# Altium PCB Pocket_Organ_V17_2021-03-17.pcbdoc (part 1 of 2)
Units mil, origin at the board's own origin, x right, y up, seen from the top; angles counter-clockwise.
Board outline 7067.95 x 4900.94 mil, 2 copper layers (Top Layer, Bottom Layer); 193 components, 249 nets, 797 pads, 188 vias.
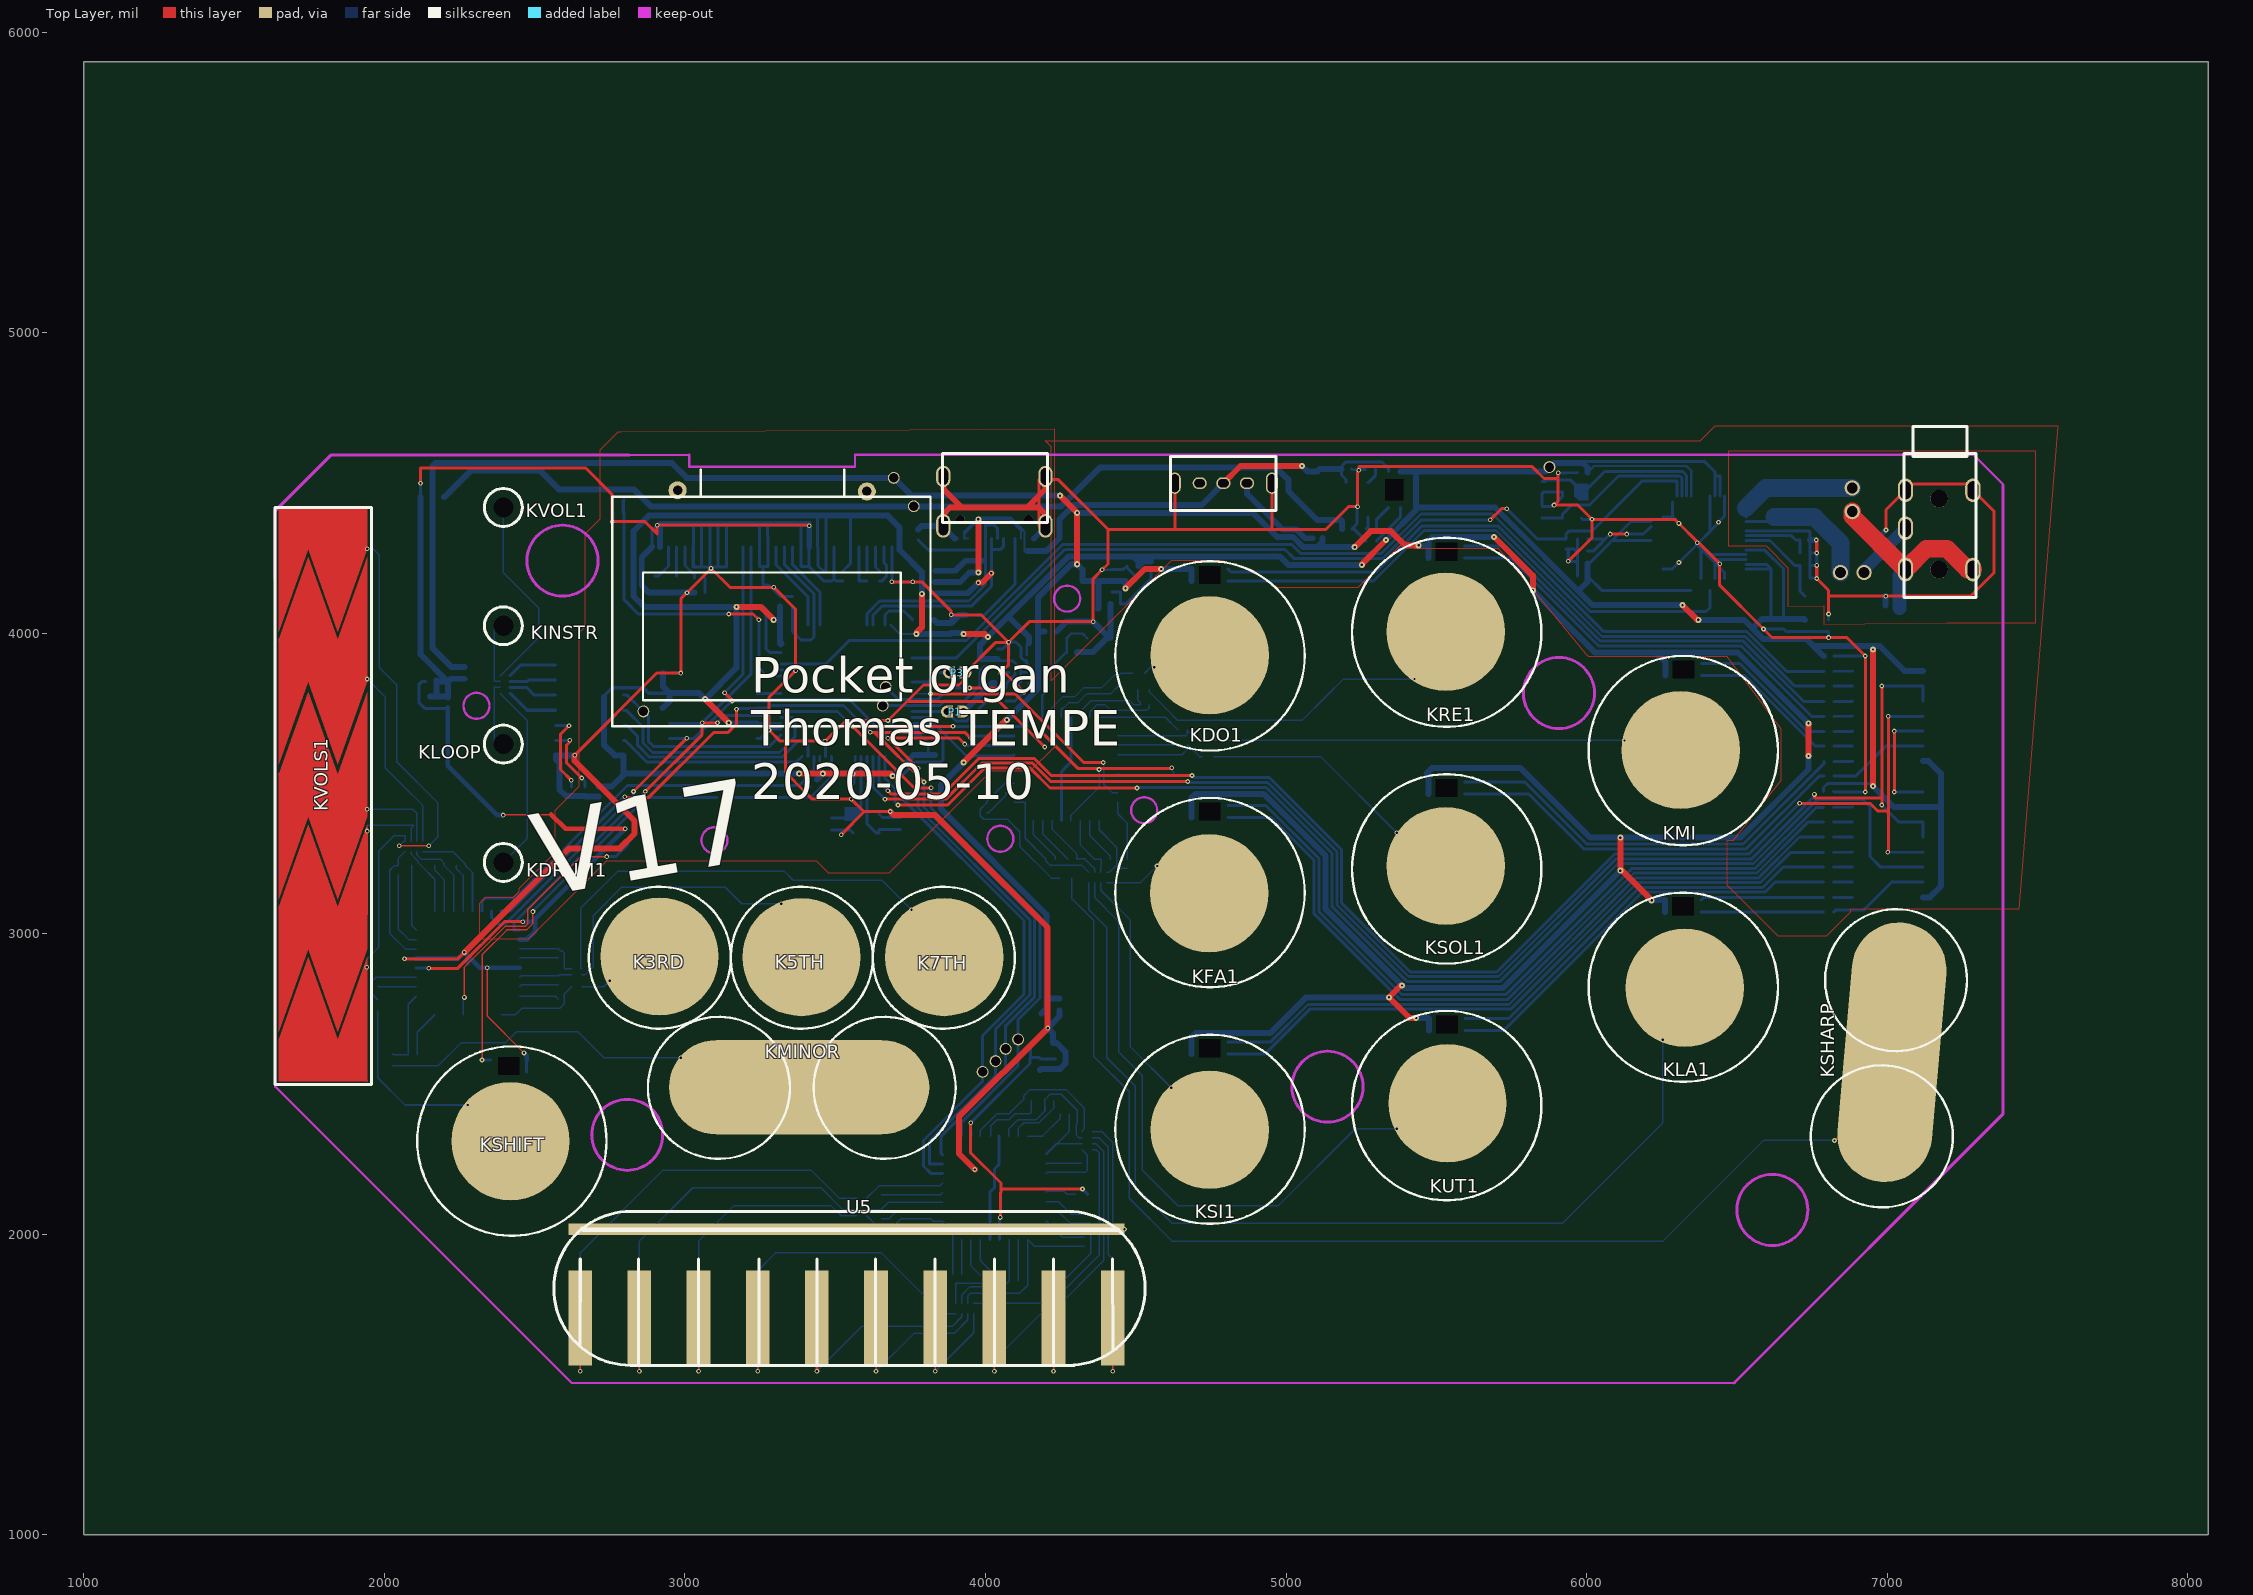
[diagram p0: Top Layer view]
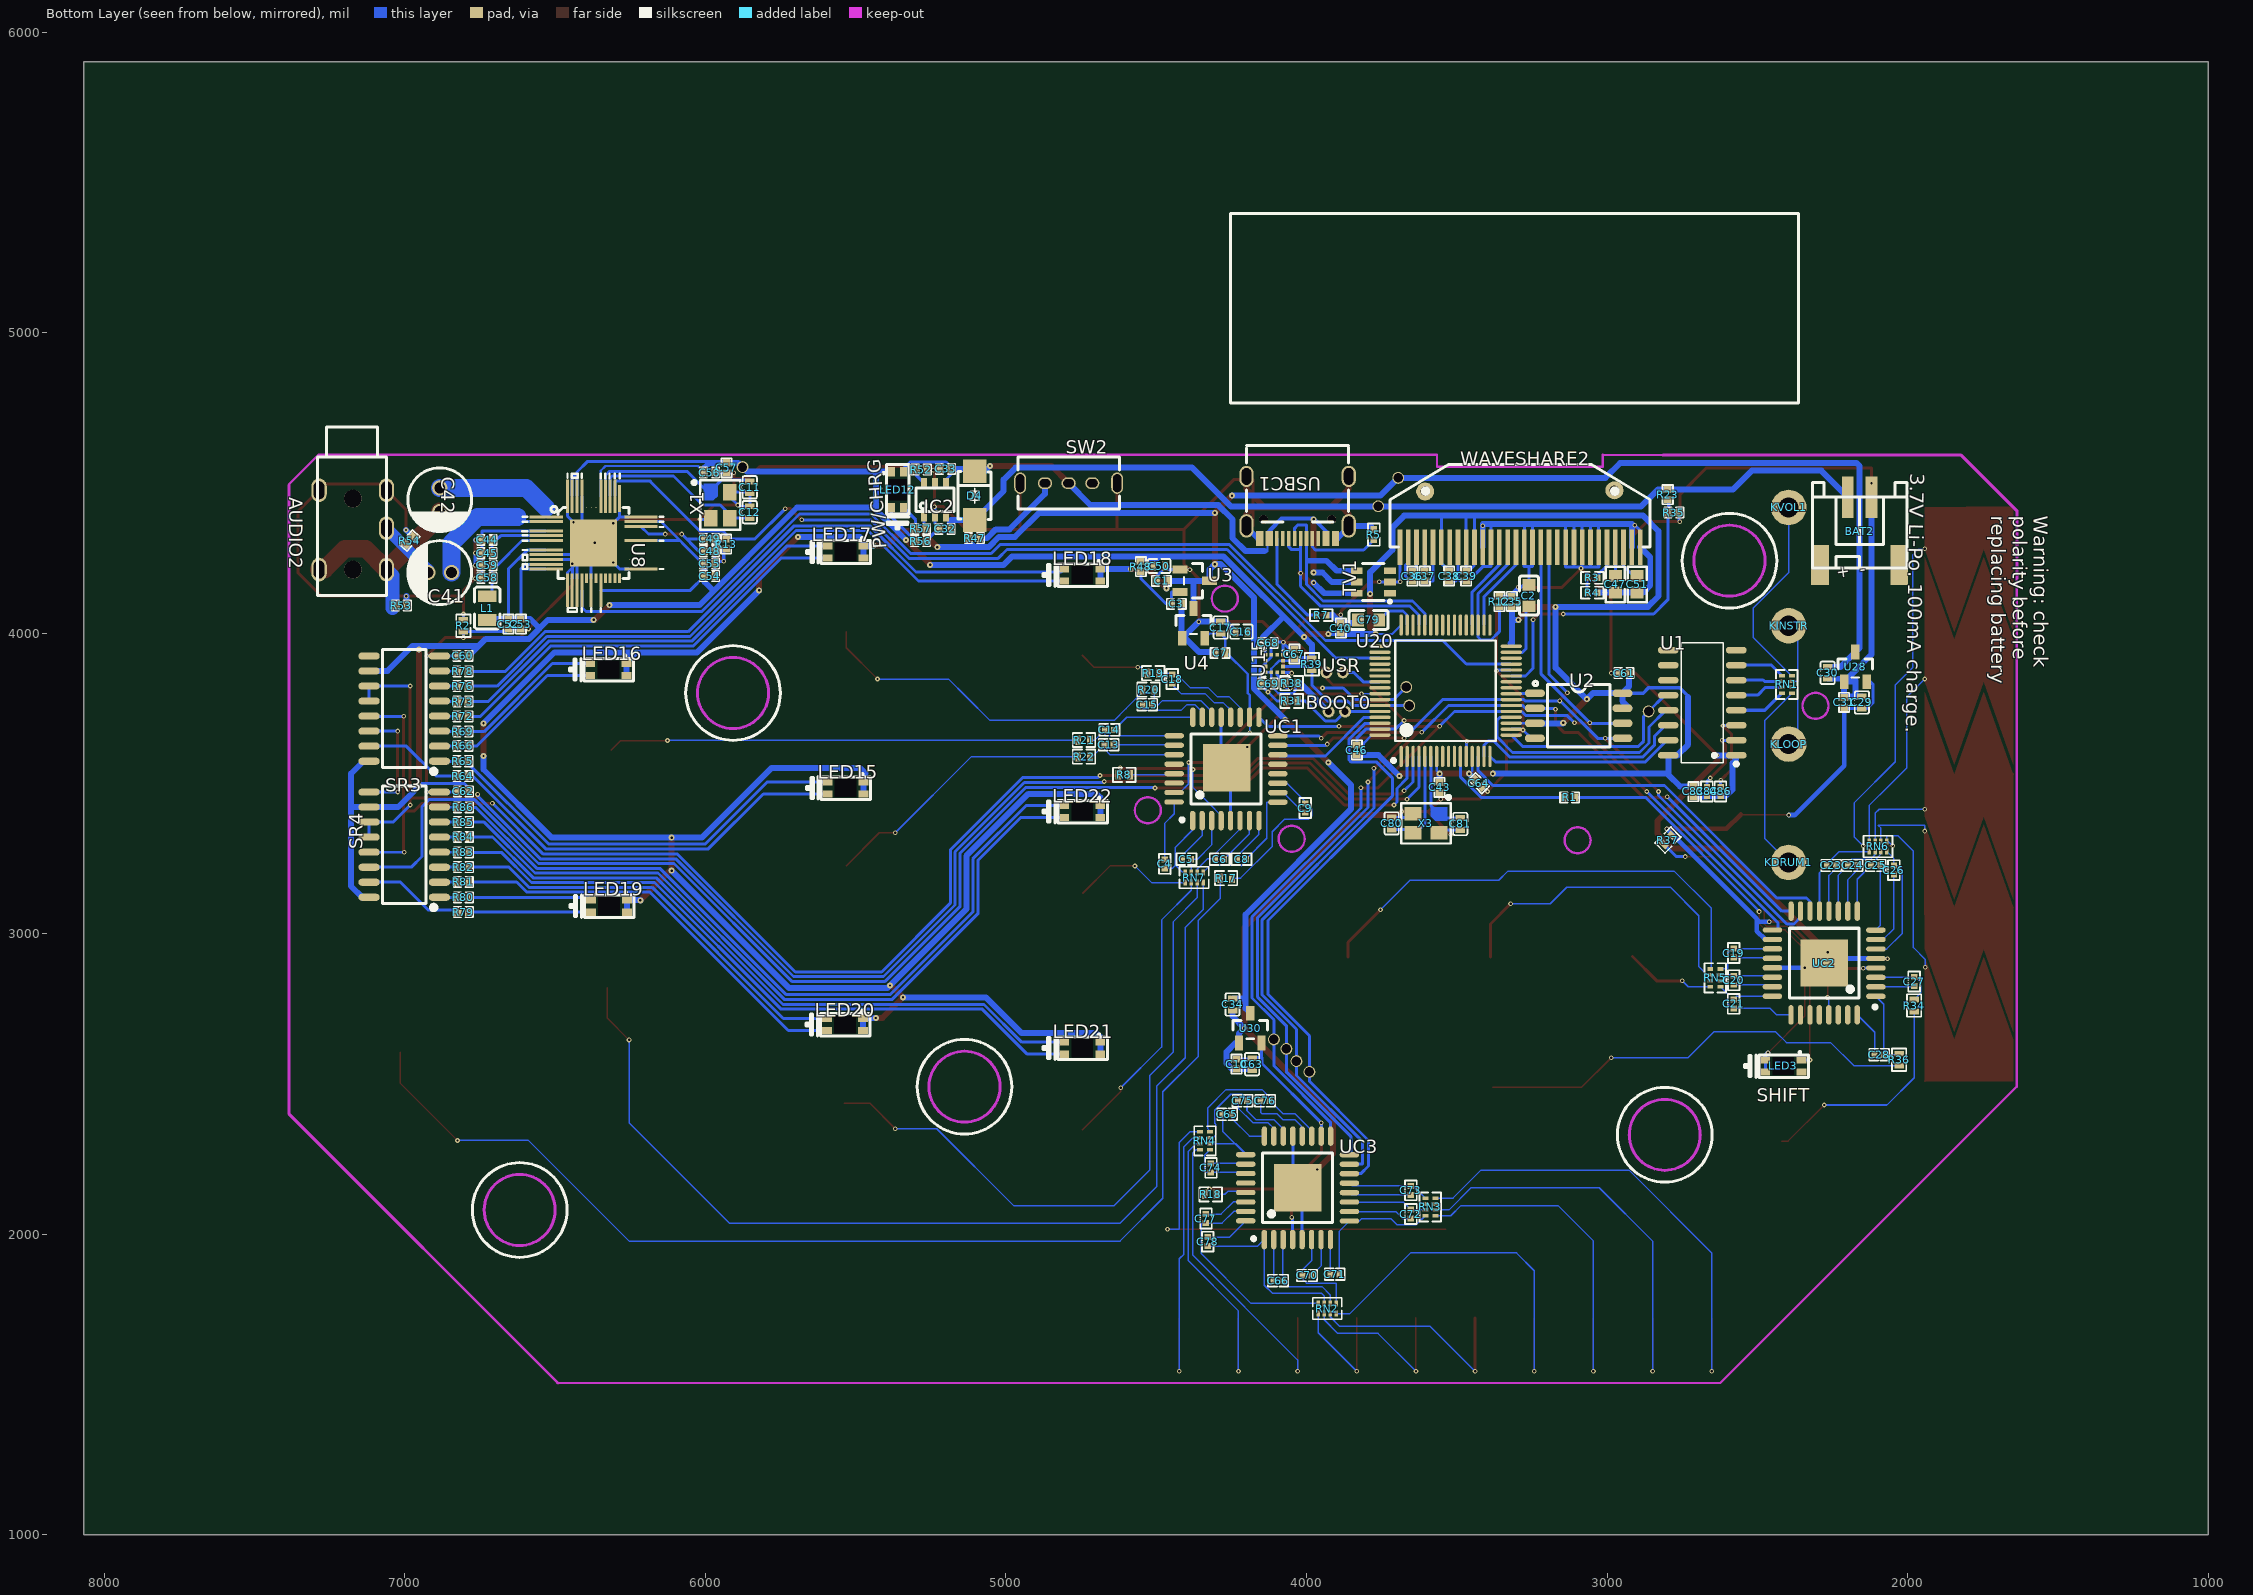
[diagram p1: Bottom Layer view, seen from below]

## Layer stack, top to bottom
Top Layer: signal copper (thickness not stored)
Dielectric: dielectric 12.6, FR-4, Dk 4.8
Bottom Layer: signal copper (thickness not stored)

## Board outline
8067.95,1000 1000,1000 1000,5900.94 8067.95,5900.94

## Components (designator, comment, footprint, x,y, rotation, side; value= is the part's Value field where it differs from the comment)
AUDIO2 "PJ-313D_C319112" PHONE-JACK-5P-6.0X12.5-H5.0 7173.22,4343.58 r90 bottom
BAT2 "A2001WR-S-2P" A2001WR-S-2P 2159.44,4339.65 r180 bottom
C1 "1u" 0402 4482.28,4174.29 r0 bottom
C2 "2.2uF" C0603 3259.84,4125.08 r270 bottom
C3 "1u" 0402 4433.07,4097.52 r180 bottom
C4 "4.7nF" C0402#1 4472.12,3232.35 r90 bottom
C5 "4.7nF" C0402#1 4399.29,3248.1 r0 bottom
C6 "4.7nF" C0402#1 4289.05,3248.1 r180 bottom
C7 "100n" 0402 4287.4,3934.13 r180 bottom
C8 "4.7nF" C0402#1 4216.22,3248.1 r0 bottom
C9 "4.7nF" C0402#1 4003.93,3418.18 r270 bottom
C10 "100n" 0402 4232.28,2566.03 r90 bottom
C11 "20pF" C0402#2 5852.36,4485.32 r270 bottom
C12 "20pF" C0402#2 5852.36,4402.64 r90 bottom
C13 "4.7nF" C0402#1 4657.47,3628.81 r0 bottom
C14 "4.7nF" C0402#1 4655.5,3678.02 r0 bottom
C15 "4.7nF" C0402#1 4529.52,3762.66 r180 bottom
C16 "1uF" C0402#2 4216.53,4005 r0 bottom
C17 "1uF" C0402#2 4285.43,4018.78 r90 bottom
C18 "4.7nF" C0402#1 4446.84,3847.31 r90 bottom
C19 "4.7nF" C0402#1 2578.74,2935.89 r90 bottom
C20 "4.7nF" C0402#1 2578.74,2845.33 r90 bottom
C21 "4.7nF" C0402#1 2578.74,2766.59 r270 bottom
C23 "4.7nF" C0402#1 2253.93,3227.46 r180 bottom
C24 "4.7nF" C0402#1 2183.07,3227.44 r180 bottom
C25 "4.7nF" C0402#1 2106.29,3227.46 r180 bottom
C26 "4.7nF" C0402#1 2045.27,3211.69 r270 bottom
C27 "4.7nF" C0402#1 1977.95,2840.98 r270 bottom
C28 "4.7nF" C0402#1 2094.49,2597.52 r0 bottom
C29 "1uF" C0402#2 2152.04,3769.69 r90 bottom
C30 "1uF" C0402#2 2266.22,3868.1 r270 bottom
C31 "100n" 0402 2211.09,3769.69 r90 bottom
C32 "10u" 0402 5202.75,4347.48 r180 bottom
C33 "100n" 0402 5200.78,4546.34 r180 bottom
C34 "1uF" C0402#2 4246.06,2764.84 r270 bottom
C35 "100n" 0402 3316.93,4105.39 r90 bottom
C36 "1u" 0402 3647.63,4190.04 r270 bottom
C37 "1u" 0402 3606.3,4190.04 r90 bottom
C38 "1u" 0402 3525.59,4190.04 r90 bottom
C39 "1u" 0402 3468.5,4190.04 r270 bottom
C40 "100n" 0402 3885.82,4016.81 r90 bottom
C41 "100uF" CAP_5X5.4 6883.85,4201.85 r0 bottom
C42 "100uF" CAP_5X5.4 6883.85,4443.97 r270 bottom
C43 "100n" 0402 3557.08,3487.28 r270 bottom
C44 "100n" 0402 6726.38,4310.12 r180 bottom
C45 "10u" 0402 6726.37,4266.81 r180 bottom
C46 "100n" 0402 3832.67,3611.3 r90 bottom
C47 "2.2u" 0603 2972.44,4162.48 r270 bottom
C48 "4.7u" 0402 5986.21,4272.72 r0 bottom
C49 "100n" 0402 5986.21,4314.05 r0 bottom
C50 "4.7uF" C0402#2 4490.15,4223.5 r180 bottom
C51 "2.2u" 0603 2899.6,4162.48 r90 bottom
C52 "100n" 0402 6655.5,4030.59 r270 bottom
C53 "100n" 0402 6614.16,4030.59 r270 bottom
C54 "100n" 0402 5986.21,4190.04 r180 bottom
C55 "100n" 0402 5986.21,4231.38 r180 bottom
C56 "10u" 0402 5986.21,4534.52 r180 bottom
C57 "100n" 0402 5929.13,4550.27 r270 bottom
C58 "100n" 0402 6726.37,4184.13 r180 bottom
C59 "10u" 0402 6726.37,4225.47 r180 bottom
C60 "100n" 0402 6807.08,3924.29 r180 bottom
C61 "100n" 0402 2942.91,3867.2 r0 bottom
C62 "100n" 0402 6805.11,3473.5 r180 bottom
C63 "1uF" C0402#2 4181.1,2566.03 r270 bottom
C64 "100n" 0402 3427.16,3501.06 r225 bottom
C65 "4.7nF" C0402#1 4263.77,2398.7 r0 bottom
C66 "4.7nF" C0402#1 4094.48,1845.55 r0 bottom
C67 "100n" 0402 4040.57,3930.56 r90 bottom
C68 "100n" 0402 4127.18,3967.96 r0 bottom
C69 "100n" 0402 4127.17,3832.13 r0 bottom
C70 "4.7nF" C0402#1 3998.03,1863.27 r180 bottom
C71 "4.7nF" C0402#1 3905.51,1867.21 r180 bottom
C72 "4.7nF" C0402#1 3652.9,2067.36 r90 bottom
C73 "4.7nF" C0402#1 3652.9,2146.1 r90 bottom
C74 "4.7nF" C0402#1 4317.95,2220.98 r90 bottom
C75 "4.7nF" C0402#1 4212.59,2443.98 r180 bottom
C76 "4.7nF" C0402#1 4137.79,2443.98 r180 bottom
C77 "4.7nF" C0402#1 4334.64,2052.25 r90 bottom
C78 "4.7nF" C0402#1 4328.73,1975.47 r90 bottom
C79 "2.2uF" C0603 3793.3,4044.37 r0 bottom
C80 "10pF" C0402#2 3716.53,3367.21 r270 bottom
C81 "10pF" C0402#2 3488.18,3365.24 r270 bottom
C83 "100n" 0402 2712.59,3473.3 r270 bottom
C84 "4.7nF" C0402#1 2667.32,3473.3 r270 bottom
C86 "100pF" C0402#1 2622.04,3473.3 r270 bottom
D4 "SS14" SMA_L4.3-W2.6-LS5.2-FD 5104.32,4457.72 r270 bottom
IC2 "TP4057" SOT-23-6 5236.21,4443.93 r0 bottom
K3RD "CAPACITIVE_PAD" CAPACITIVE_PAD_ROUND 2915.35,2924.29 r0 top
K5TH "CAPACITIVE_PAD" CAPACITIVE_PAD_ROUND 3387.79,2922.32 r0 top
K7TH "CAPACITIVE_PAD" CAPACITIVE_PAD_ROUND 3862.2,2922.32 r0 top
KDO1 "CAPACITIVE_PAD" CAPACITIVE_PAD_ROUND 4746.02,3926.28 r0 top
KDRUM1 "CAPACITIVE_PAD" T1147-1_PIN 2395.66,3237.28 r0 top
KFA1 "CAPACITIVE_PAD" CAPACITIVE_PAD_ROUND 4744.12,3134.88 r0 top
KINSTR "CAPACITIVE_PAD" T1147-1_PIN 2395.66,4024.68 r0 top
KLA1 "CAPACITIVE_PAD" CAPACITIVE_PAD_ROUND 6326.72,2819.98 r0 top
KLOOP "CAPACITIVE_PAD" T1147-1_PIN 2395.66,3630.98 r0 top
KMI "CAPACITIVE_PAD" CAPACITIVE_PAD_ROUND 6312.99,3611.3 r0 top
KMINOR "CAPACITIVE_PAD" CAPACITIVE_PAD_OVAL_22_8#1 3379.92,2489.25 r0 top
KRE1 "CAPACITIVE_PAD" CAPACITIVE_PAD_ROUND 5531.52,4004.98 r0 top
KSHARP "CAPACITIVE_PAD" CAPACITIVE_PAD_OVAL_22_8#2 7015.74,2605.39 r90 top
KSHIFT "CAPACITIVE_PAD" CAPACITIVE_PAD_ROUND 2419.32,2310.08 r0 top
KSI1 "CAPACITIVE_PAD" CAPACITIVE_PAD_ROUND 4746.02,2347.48 r0 top
KSOL1 "CAPACITIVE_PAD" CAPACITIVE_PAD_ROUND 5531.52,3225.48 r0 top
KUT1 "CAPACITIVE_PAD" CAPACITIVE_PAD_ROUND 5537.42,2436.08 r0 top
KVOL1 "CAPACITIVE_PAD" T1147-1_PIN 2395.66,4418.39 r0 top
KVOLS1 "Slide Key 4 pads" SLIDER_4 1942.92,3532.58 r90 top
L1 "600Ω" L0805 6726.37,4083.74 r270 bottom
LED3 "SHIFT" LED-SMD_4PIN-L3.2-W1.25-H1.1-TR-TEMPE 2413.39,2560.12 r0 bottom
LED12 "PW/CHRG" LED-SMD_4PIN-L3.2-W1.25-H1.1-TR-TEMPE 5360.23,4477.4 r270 bottom
LED15 "Reverse bicolor LED" LED-SMD_4PIN-L3.2-W1.25-H1.1-TR-TEMPE 5533.46,3485.32 r0 bottom
LED16 "Reverse bicolor LED" LED-SMD_4PIN-L3.2-W1.25-H1.1-TR-TEMPE 6322.83,3879.01 r0 bottom
LED17 "Reverse bicolor LED" LED-SMD_4PIN-L3.2-W1.25-H1.1-TR-TEMPE 5533.46,4270.75 r0 bottom
LED18 "Reverse bicolor LED" LED-SMD_4PIN-L3.2-W1.25-H1.1-TR-TEMPE 4746.06,4193.98 r0 bottom
LED19 "Reverse bicolor LED" LED-SMD_4PIN-L3.2-W1.25-H1.1-TR-TEMPE 6320.86,3091.61 r0 bottom
LED20 "Reverse bicolor LED" LED-SMD_4PIN-L3.2-W1.25-H1.1-TR-TEMPE 5535.43,2697.91 r0 bottom
LED21 "Reverse bicolor LED" LED-SMD_4PIN-L3.2-W1.25-H1.1-TR-TEMPE 4746.06,2619.18 r0 bottom
LED22 "Reverse bicolor LED" LED-SMD_4PIN-L3.2-W1.25-H1.1-TR-TEMPE 4746.06,3406.57 r0 bottom
P1 "BOOT0" JUMPER 3901.57,3739.25 r0 bottom
P3 "USR" JUMPER 3903.54,3869.17 r180 bottom
R1 "1k" 0402 3124.01,3453.82 r0 bottom
R2 "0" R0402#1 6805.11,4024.68 r270 bottom
R3 "200K" R0402#2 3049.21,4184.13 r0 bottom
R4 "200K" R0402#2 3049.21,4134.92 r180 bottom
R5 "5.1K" R0402#2 3775.59,4327.83 r270 bottom
R7 "5.1K" R0402#2 3950.78,4060.12 r180 bottom
R8 "100K" R0402#1 4606.29,3528.41 r180 bottom
R12 "47k" 0402 3358.26,4105.39 r270 bottom
R13 "47k" 0402 5931.09,4296.34 r270 bottom
R17 "4.7K" R0402#1 4267.4,3185.11 r0 bottom
R18 "100K" R0402#1 4318.89,2132.95 r180 bottom
R19 "4.7K" R0402#1 4509.83,3866.99 r0 bottom
R20 "4.7K" R0402#1 4525.58,3811.88 r0 bottom
R21 "4.7K" R0402#1 4740.15,3644.55 r0 bottom
R22 "4.7K" R0402#1 4740.15,3589.44 r0 bottom
R23 "47k" 0402 2797.95,4460.98 r90 bottom
R31 "10K" R0402#1 4049.2,3774.48 r180 bottom
R34 "4.7K" R0402#1 1977.95,2760.98 r270 bottom
R35 "47k" 0402 2777.95,4400.98 r180 bottom
R36 "4.7K" R0402#1 2027.95,2580.98 r270 bottom
R37 "100K" R0402#1 2797.24,3311.88 r315 bottom
R38 "4.7K" R0402#1 4049.2,3833.53 r0 bottom
R39 "4.7K" R0402#1 3982.28,3896.52 r270 bottom
R47 "1" 0402 5104.32,4315.98 r180 bottom
R48 "1" 0402 4551.18,4221.53 r270 bottom
R52 "10k" 0402 5281.49,4544.37 r0 bottom
R53 "47k" 0402 7011.8,4091.61 r180 bottom
R54 "47k" 0402 6984.24,4308.15 r132 bottom
R56 "220" 0402 5283.46,4306.14 r0 bottom
R57 "2k" 0402 5283.46,4347.48 r0 bottom
R64 "220" 0402 6807.08,3524.68 r180 bottom
R65 "220" 0402 6807.08,3573.9 r180 bottom
R66 "220" 0402 6807.08,3625.08 r180 bottom
R69 "220" 0402 6807.08,3672.32 r180 bottom
R72 "220" 0402 6807.08,3723.5 r180 bottom
R73 "220" 0402 6807.08,3772.72 r180 bottom
R76 "220" 0402 6807.08,3823.9 r180 bottom
R78 "220" 0402 6807.08,3873.11 r180 bottom
R79 "220" 0402 6805.11,3071.93 r180 bottom
R80 "220" 0402 6805.11,3121.14 r180 bottom
R81 "220" 0402 6805.11,3172.32 r180 bottom
R82 "220" 0402 6805.11,3221.54 r180 bottom
R83 "220" 0402 6805.11,3270.75 r180 bottom
R84 "220" 0402 6805.11,3321.93 r180 bottom
R85 "220" 0402 6805.11,3371.14 r180 bottom
R86 "220" 0402 6805.11,3420.36 r180 bottom
RN1 "1K" RES-ARRAY-SMD_0402-8P-L2.0-W1.0-BL 2401.57,3829.59 r90 bottom
RN2 "10k" RES-ARRAY-SMD_0402-8P-L2.0-W1.0-BL 3931.1,1753.04 r180 bottom
RN3 "10k" RES-ARRAY-SMD_0402-8P-L2.0-W1.0-BL 3587.95,2090.98 r90 bottom
RN4 "10k" RES-ARRAY-SMD_0402-8P-L2.0-W1.0-BL 4337.95,2310.98 r270 bottom
RN5 "10k" RES-ARRAY-SMD_0402-8P-L2.0-W1.0-BL 2639.72,2853.18 r90 bottom
RN6 "10k" RES-ARRAY-SMD_0402-8P-L2.0-W1.0-BL 2098.42,3290.48 r0 bottom
RN7 "10k" RES-ARRAY-SMD_0402-8P-L2.0-W1.0-BL 4373.72,3187.08 r180 bottom
SR3 "74HC595A" SOIC-16_150MIL 7001.96,3749.09 r270 bottom
SR4 "74HC595A" SOIC-16_150MIL 7001.96,3296.34 r270 bottom
SW2 "SK-12D02-VG3" SW-TH_SK-12D02VG3 4791.33,4499.09 r0 bottom
TV1 "SRV05-4-P-T7" SOT-23-6_L2.9-W1.6-P0.95-LS2.8-BR 3777.55,4170.35 r0 bottom
U1 "XW06A" SOP-16_L10.0-W3.9-P1.27-LS6.0-BL 2681.1,3778.62 r270 bottom
U2 "W25Q128JVSIQTR" SOIC-8_L5.3-W5.3-P1.27-LS8.0-BL 3094.48,3725.26 r90 bottom
U3 "XC6206P332MR" SOT-23-3_L2.9-W1.6-P1.90-LS2.8-BR 4372.04,4174.29 r180 bottom
U4 "XC6206P332MR" SOT-23-3_L2.9-W1.6-P1.90-LS2.8-BR 4375.98,4032.56 r90 bottom
U5 "Strumming_comb" STRUMMING_COMB_10+MUTE 3537.4,1721.54 r0 top
U8 "SAM2695" QFN48G-0.4-6X6MM 6372.04,4300.27 r90 bottom
U15 "KXTJ3-1057" LGA-12_L2.0-W2.0-P0.50-BL 4107.49,3899.06 r270 bottom
U20 "STM32F405RGT6" LQFP-64_L10.0-W10.0-P0.50-LS12.0-TL 3537.22,3808.59 r270 bottom
U28 "XC6206P332MR" SOT-23-3_L2.9-W1.6-P1.90-LS2.8-BR 2173.69,3887.8 r90 bottom
U30 "XC6206P332MR" SOT-23-3_L2.9-W1.6-P1.90-LS2.8-BR 4187,2686.1 r90 bottom
UC1 "AT42QT1110-AUR" TQFP-32_L7.0-W7.0-P0.80-LS9.0-BL 4267.71,3548.31 r0 bottom
UC2 "AT42QT1110-AUR" TQFP-32_L7.0-W7.0-P0.80-LS9.0-BL 2277.55,2902.64 r270 bottom
UC3 "AT42QT1110-AUR" TQFP-32_L7.0-W7.0-P0.80-LS9.0-BL 4029.52,2154.61 r0 bottom
USBC1 "TYPE-C-31-M-12" USB-C_SMD-TYPE-C-31-M-12 4029.52,4418.39 r180 bottom
WAVESHARE2 "SSD1306-128x64-OLED-SPI" "SSD1306-30PIN-POT REVERSED" 3289.37,4286.49 r0 bottom
X1 "12MHz" OSC-SMD_4P-L3.2-W2.5-BL 5950.79,4426.26 r90 bottom
X3 "12MHz" OSC-SMD_4P-L3.2-W2.5-BL 3602.36,3367.21 r180 bottom

## Footprints (in the part's own frame and the unit in brackets; to place one, negate y for a bottom-side part, rotate by r counter-clockwise, add the part's x,y. Pads: shape width x height; smd on the part's side, far side on the other; paste and mask are expansions set on the pad)
0402 [mm]
  rect 0.6x0.65 smd: 1(0.424,0) 2(-0.424,0)
  silkscreen extent -0.81,-0.43 0.82,0.43
0603 [mm]
  rect 1x1.1 smd: 1(0.7,0) 2(-0.7,0)
  silkscreen extent -1.5,-0.8 1.5,0.8
A2001WR-S-2P [mm]
  rect 1x3.5 smd: 1(-1,2.875) 2(1,2.875)
  rect 1.5x3.4 smd: 4(-3.349,-2.875) 5(3.349,-2.875)
  silkscreen extent -4,-3.13 4,4.12
C0402#1 [mm]
  rect 0.5x0.54 smd: 1(0.381,0) 2(-0.381,0)
  silkscreen extent -0.84,-0.5 0.84,0.48
C0402#2 [mm]
  rect 0.5x0.8 smd: 1(0.5,0) 2(-0.5,0)
  silkscreen extent -0.95,-0.6 0.95,0.6
C0603 [mm]
  rect 1x1.1 smd: 1(0.9,0) 2(-0.9,0)
  silkscreen extent -1.65,-0.8 1.65,0.8
CAP_5X5.4 [mm]
  round 1.3 hole 0.914: 1(-1,0) 2(1,0)
  silkscreen extent -2.7,-2.7 2.7,2.7
CAPACITIVE_PAD_OVAL_22_8#1 [mm]
  oval 22x8 smd: 1(0,0)
CAPACITIVE_PAD_OVAL_22_8#2 [mm]
  oval 22x8 smd rot 175: 1(0,0)
CAPACITIVE_PAD_ROUND [mm]
  round 10 smd: 1(0,0)
JUMPER [mm]
  rect 0.5x1 smd far side: 1(0.381,0) 2(-0.508,0)
  round 1 hole 0.6: 1(0.635,0) 2(-0.762,0)
L0805 [mm]
  rect 1x1.55 smd: 1(1,0) 2(-1,0)
  silkscreen extent -1.78,-1.08 1.78,1.08
LED-SMD_4PIN-L3.2-W1.25-H1.1-TR-TEMPE [mil]
  rect 32.68x23.62 smd: 1(-60,-20) 2(60,-20) 3(-60,20) 4(60,20)
  Multi-Layer board cut-out: 35.43,-29.53 35.43,29.53 -35.43,29.53 -35.43,-29.53
  silkscreen extent -84,-48 130,38
LGA-12_L2.0-W2.0-P0.50-BL [mm]
  rect 0.3x0.33 smd: 1(0.75,0.75) 2(0.25,0.75) 3(-0.25,0.75) 4(-0.75,0.75) 7(-0.75,-0.75) 8(-0.25,-0.75) 9(0.25,-0.75) 10(0.75,-0.75)
  rect 0.3x0.3 smd: 5(-0.75,0.25) 6(-0.75,-0.25) 11(0.75,-0.25) 12(0.75,0.25)
  silkscreen extent -1.09,-1.09 1.3,1.38
LQFP-64_L10.0-W10.0-P0.50-LS12.0-TL [mm]
  oval 1.8x0.28 smd: 1(5.55,-3.75) 2(5.55,-3.25) 3(5.55,-2.75) 4(5.55,-2.25) 5(5.55,-1.75) 6(5.55,-1.25) 7(5.55,-0.75) 8(5.55,-0.25) 9(5.55,0.25) 10(5.55,0.75) 11(5.55,1.25) 12(5.55,1.75) 13(5.55,2.25) 14(5.55,2.75) 15(5.55,3.25) 16(5.55,3.75) 33(-5.55,3.75) 34(-5.55,3.25) 35(-5.55,2.75) 36(-5.55,2.25) 37(-5.55,1.75) 38(-5.55,1.25) 39(-5.55,0.75) 40(-5.55,0.25) 41(-5.55,-0.25) 42(-5.55,-0.75) 43(-5.55,-1.25) 44(-5.55,-1.75) 45(-5.55,-2.25) 46(-5.55,-2.75) 47(-5.55,-3.25) 48(-5.55,-3.75)
  oval 0.28x1.8 smd: 17(3.75,5.55) 18(3.25,5.55) 19(2.75,5.55) 20(2.25,5.55) 21(1.75,5.55) 22(1.25,5.55) 23(0.75,5.55) 24(0.25,5.55) 25(-0.25,5.55) 26(-0.75,5.55) 27(-1.25,5.55) 28(-1.75,5.55) 29(-2.25,5.55) 30(-2.75,5.55) 31(-3.25,5.55) 32(-3.75,5.55) 49(-3.75,-5.55) 50(-3.25,-5.55) 51(-2.75,-5.55) 52(-2.25,-5.55) 53(-1.75,-5.55) 54(-1.25,-5.55) 55(-0.75,-5.55) 56(-0.25,-5.55) 57(0.25,-5.55) 58(0.75,-5.55) 59(1.25,-5.55) 60(1.75,-5.55) 61(2.25,-5.55) 62(2.75,-5.55) 63(3.25,-5.55) 64(3.75,-5.55)
  silkscreen extent -4.25,-4.55 6.05,4.25
OSC-SMD_4P-L3.2-W2.5-BL [mm]
  round 0 smd: 1(1.1,0.8)
  rect 1.4x1.15 smd: 2(-1.1,0.8) 3(-1.1,-0.8) 4(1.1,-0.8)
  Top Layer region: 1.8,0.225 0.762,0.225 0.4,0.604 0.4,1.375 1.8,1.375
  silkscreen extent -2.1,-1.7 2.1,2.35
PHONE-JACK-5P-6.0X12.5-H5.0 [mm]
  oval 2x1.3 hole 0.9 slot 1.5 at 0 deg: 1(3.35,-2.85) 1(3.35,2.85) 2(0.15,-2.85) 3(-3.35,-2.85) 3(-3.35,2.85)
  round 1.5 hole 1.5 unplated: ""(-3.35,0) ""(2.65,0)
  silkscreen extent -5.54,-2.85 8.68,2.99
QFN48G-0.4-6X6MM [mil]
  rect 10x110.24 smd: 1(87,157.48) 2(71,157.48) 4(39,157.48) 5(24,157.48) 6(8,157.48) 8(-24,157.48) 9(-39,157.48) 10(-55,157.48) 11(-71,157.48) 12(-87,157.48) 25(-87,-157.36) 31(8,-157.36) 34(55,-157.36) 35(71,-157.36) 36(87,-157.36)
  rect 0.39x0.39 smd: 3(55,118) 7(-8,118) 26(-71,-118) 27(-55,-118) 28(-39,-118) 29(-24,-118) 30(-8,-118) 32(24,-118) 33(39,-118) 42(118,-8) 43(118,8) 44(118,24)
  rect 110.24x10 smd: 13(-157.48,87) 14(-157.48,71) 15(-157.48,55) 16(-157.48,39) 18(-157.48,8) 20(-157.48,-24) 38(155.51,-71) 39(155.51,-55) 40(155.51,-39) 41(155.51,-24) 45(155.51,39) 46(155.51,55) 47(155.51,71) 48(155.51,87)
  rect 31.5x10 smd: 17(-118,24) 19(-118,-8) 21(-118,-39) 22(-118,-55) 23(-118,-71) 24(-118,-87)
  rect 90.55x10 smd: 37(147.63,-87)
  rect 157.48x157.48 smd: PAD(0,0)
  silkscreen extent -118,-118 122,142
R0402#1 [mm]
  rect 0.5x0.8 smd: 1(0.5,0) 2(-0.5,0)
  silkscreen extent -0.95,-0.6 0.95,0.6
R0402#2 [mm]
  rect 0.566x0.54 smd: 1(0.433,0) 2(-0.433,0)
  silkscreen extent -0.94,-0.5 0.94,0.5
RES-ARRAY-SMD_0402-8P-L2.0-W1.0-BL [mm]
  rect 0.3x0.505 smd: 1(0.75,-0.427) 2(0.25,-0.427) 3(-0.25,-0.427) 4(-0.75,-0.427) 5(-0.75,0.428) 6(-0.25,0.428) 7(0.25,0.428) 8(0.75,0.428)
  silkscreen extent -1.23,-0.91 1.23,0.91
SLIDER_4 [mm]
  round 0 smd: 1(-26,0) 1(22.5,7.5) 2(-11.3,7.5) 3(-0.1,7.5) 4(11.3,7.5)
  Top Layer region: -26,0 -15.5,0 -22.5,2.5 -15.5,5 -22.5,7.5 -26,7.5
  Top Layer region: 22.5,7.5 12,7.5 19,5 12,2.5 19,0 22.5,0
  Top Layer region: -11.3,7.5 -21.8,7.5 -14.8,5 -21.8,2.5 -14.8,0 -4.3,0 -11.3,2.5 -4.3,5
  Top Layer region: -0.1,7.5 -10.6,7.5 -3.6,5 -10.6,2.5 -3.6,0 6.9,0 -0.1,2.5 6.9,5
  Top Layer region: 11.3,7.5 0.8,7.5 7.8,5 0.8,2.5 7.8,0 18.3,0 11.3,2.5 18.3,5
SMA_L4.3-W2.6-LS5.2-FD [mm]
  rect 2x2 smd: 1(2.057,0) 2(-2.057,0)
  silkscreen extent -2.03,-1.4 2.01,1.4
SOIC-8_L5.3-W5.3-P1.27-LS8.0-BL [mm]
  oval 0.65x1.7 smd: 1(1.905,3.7) 2(0.635,3.7) 3(-0.635,3.7) 4(-1.905,3.7) 5(-1.905,-3.7) 6(-0.635,-3.7) 7(0.635,-3.7) 8(1.905,-3.7)
  silkscreen extent -2.63,-2.64 2.92,3.84
SOIC-16_150MIL [mm]
  oval 0.6x1.8 smd: 1(4.445,2.972) 2(3.175,2.972) 3(1.905,2.972) 4(0.635,2.972) 5(-0.635,2.972) 6(-1.905,2.972) 7(-3.175,2.972) 8(-4.445,2.972) 9(-4.445,-2.972) 10(-3.175,-2.972) 11(-1.905,-2.972) 12(-0.635,-2.972) 13(0.635,-2.972) 14(1.905,-2.972) 15(3.175,-2.972) 16(4.445,-2.972)
  silkscreen extent -4.98,-1.83 5.51,2.69
SOP-16_L10.0-W3.9-P1.27-LS6.0-BL [mm]
  oval 0.56x1.745 smd: 1(4.699,2.822) 2(3.429,2.822) 3(2.159,2.822) 4(0.889,2.822) 5(-0.381,2.822) 6(-1.651,2.822) 7(-2.921,2.822) 8(-4.191,2.822) 9(-4.191,-2.923) 10(-2.921,-2.923) 11(-1.651,-2.923) 12(-0.381,-2.923) 13(0.889,-2.923) 14(2.159,-2.923) 15(3.429,-2.923) 16(4.699,-2.923)
  silkscreen extent -4.82,-1.82 5.58,2.97
SOT-23-3_L2.9-W1.6-P1.90-LS2.8-BR [mm]
  rect 1.25x0.7 smd: 1(-1.25,0.95) 2(-1.25,-0.95) 3(1.25,0)
  silkscreen extent -0.9,-1.46 0.65,1.46
SOT-23-6 [mil]
  rect 20.1x31.5 smd: 1(37,57) 2(0,57) 3(-37,57) 4(-37,-57) 5(0,-57) 6(37,-57)
  silkscreen extent -63,-39 63,39
SOT-23-6_L2.9-W1.6-P0.95-LS2.8-BR [mm]
  rect 1x0.55 smd: 1(-1.4,0.95) 2(-1.4,0) 3(-1.4,-0.95) 4(1.4,-0.95) 5(1.4,0) 6(1.4,0.95)
  silkscreen extent -1.52,-1.55 0.9,1.78
"SSD1306-30PIN-POT REVERSED" [mm]
  rect 0.4x3 smd: 1(10.15,0) 2(9.45,0) 3(8.75,0) 4(8.05,0) 5(7.35,0) 6(6.65,0) 7(5.95,0) 8(5.25,0) 9(4.55,0) 10(3.85,0) 11(3.15,0) 12(2.45,0) 13(1.75,0) 14(1.05,0) 15(0.35,0) 16(-0.35,0) 17(-1.05,0) 18(-1.75,0) 19(-2.45,0) 20(-3.15,0) 21(-3.85,0) 22(-4.55,0) 23(-5.25,0) 24(-5.95,0) 25(-6.65,0) 26(-7.35,0) 27(-8.05,0) 28(-8.75,0) 29(-9.45,0) 30(-10.15,0)
  silkscreen extent -11,-7 11,0
STRUMMING_COMB_10+MUTE [mm]
  rect 2x8 smd: 1(-22.5,0) 2(-17.5,0) 3(-12.5,0) 4(-7.5,0) 5(-2.5,0) 6(2.5,0) 7(7.5,0) 8(12.5,0) 9(17.5,0) 10(22.5,0)
  rect 47x1 smd: 11(0,7.5)
  silkscreen extent -24.74,-4 25.24,9
SW-TH_SK-12D02VG3 [mm]
  oval 1.2x1 hole 0.7 slot 0.9 at 0 deg: 1(2,0) 2(0,0) 3(-2,0)
  oval 1x1.8 hole 0.7 slot 1.5 at 90 deg: 4(-4.1,0) 5(4.1,0)
  silkscreen extent -4.3,-2.2 4.3,2.2
T1147-1_PIN [mm]
  round 3 smd far side: 1(0,0)
  round 1.55 hole 1.7: 1(0,0)
  silkscreen extent -1.6,-1.6 1.6,1.6
TQFP-32_L7.0-W7.0-P0.80-LS9.0-BL [mm]
  oval 0.45x1.65 smd: 1(2.817,4.369) 2(2.017,4.369) 3(1.217,4.369) 4(0.417,4.369) 5(-0.381,4.369) 6(-1.181,4.369) 7(-1.981,4.369) 8(-2.781,4.369) 17(-2.791,-4.369) 18(-1.991,-4.369) 19(-1.191,-4.369) 20(-0.391,-4.369) 21(0.406,-4.369) 22(1.206,-4.369) 23(2.007,-4.369) 24(2.807,-4.369)
  oval 1.65x0.45 smd: 9(-4.381,2.804) 10(-4.381,2.004) 11(-4.381,1.204) 12(-4.381,0.404) 13(-4.381,-0.394) 14(-4.381,-1.194) 15(-4.381,-1.994) 16(-4.381,-2.794) 25(4.381,-2.804) 26(4.381,-2.004) 27(4.381,-1.204) 28(4.381,-0.404) 29(4.381,0.394) 30(4.381,1.194) 31(4.381,1.994) 32(4.381,2.794)
  silkscreen extent -2.94,-2.95 3.86,4.45
USB-C_SMD-TYPE-C-31-M-12 [mm]
  oval 1.2x2 hole 0.8 slot 1.6 at 90 deg: 0(-4.32,-1.556) 0(4.32,-1.556)
  oval 1.2x1.8 hole 0.8 slot 1.4 at 90 deg: 0(-4.32,2.624) 0(4.32,2.624)
  rect 0.3x1.3 smd: A1(3.35,-2.623) A4(2.55,-2.623) A5(1.25,-2.623) A6(0.25,-2.623) A7(-0.25,-2.623) A8(-1.25,-2.624) A9(-2.55,-2.623) A12(-3.35,-2.623) B1(-3.05,-2.623) B4(-2.25,-2.623) B5(-1.75,-2.623) B6(-0.75,-2.623) B7(0.75,-2.623) B8(1.75,-2.624) B9(2.25,-2.623) B12(3.05,-2.623)
  round 0.75 hole 0.75 unplated: ""(-2.89,-1.026) ""(2.89,-1.026)
  silkscreen extent -4.32,-1.22 4.32,5.23

## Free pads (board coordinates)
  round 60 hole 31.5: 3(2975.3,4475.48) 3(3605.22,4471.53)
  rect 157.48x157.48 smd far side: 4(2277.55,2902.64) 4(4029.52,2154.61) 4(4265.74,3552.24)
  rect 0.39x0.39 smd far side: 7(5104.33,4538.71)
  round 39.37 hole 31.5: 12(3694.88,4516.81) 13(3761.14,4422.28) 16(5876.58,4552.84) 20(4108.22,2648.35) 21(4066.92,2616.92) 22(4033.42,2576.2) 23(3990.12,2540.49) 24(3667.95,3820.98) 25(3657.95,3759.37) 26(2861.74,3739.66)

## Via types
v1: diameter 15.75, hole 7.87, Top Layer to Bottom Layer, 148 vias
v2: diameter 20, hole 7.87, Top Layer to Bottom Layer, 40 vias

## Nets (pads, with @x,y where several pads share a name; then routed paths per layer and width w, separated by ;. In a path a pad name is that pad's centre, name@x,y a point inside that pad or via, vN(x,y) a via of type N, cw(c..) or ccw(c..) an arc to the next point about the centre after c; other vN are vias at no path point)
3V3_TOUCH1: C7.1 C17.2 R8.2 U4.2 UC1.4 UC1.18 | length 1157.9
  Top Layer w5: v1@4377.82,3554.18 v1@4377.92,3546.38
  Top Layer w10: v1(4188.98,3668.39) 4307.09,3550.27 4620.07,3550.27 v1(4620.07,3552.03)
  Bottom Layer w5: v1(4188.98,3668.39) 4188.98,3719.96 UC1.18@4189.31,3720.31 ; UC1.4@4284.11,3376.31 4284.12,3393.45 4324.8,3434.13 4375.98,3485.32 4377.95,3487.28 v1(4377.95,3546.34) ; v1(4620.07,3552.03) 4620.07,3542.2 4625.98,3536.29 R8.2@4625.97,3528.41
  Bottom Layer w7.87: UC1.18@4189.31,3720.31 4188.97,3794.37 4194.88,3800.27 4194.88,3863.27 4265.74,3934.13 C7.1@4270.7,3934.13 4270.7,3984.36 C17.2@4285.43,3999.1 4322.84,3999.09 U4.2@4338.58,3983.36
3V3_TOUCH2: C29.2 C31.2 R37.2 U28.2 UC2.4 UC2.18 | length 2055.5
  Top Layer w5: v1@2395.66,3394.98 2397.63,3396.73 2555.12,3396.73
  Top Layer w10: v1(2147.64,2884.92) 2244.3,2884.92 2399.61,3040.23 v1(2460.63,3040.23)
  Top Layer w15.75: 2555.12,3396.73 2602.57,3349.28 v1(2801.18,3349.28)
  Bottom Layer w10: UC2.4@2105.55,2886.24 2146.32,2886.24 v1(2147.64,2884.92) ; U28.2@2136.29,3838.6 2124.49,3838.6 2114.64,3828.75 2114.64,3769.69 2134.32,3750.01 C29.2@2152.04,3750.01 2208.11,3750 C31.2@2211.09,3752.99
  Bottom Layer w15.75: C31.2@2211.09,3752.99 2211.1,3559.65 2375.98,3394.76 v1(2395.67,3394.76) ; UC2.18@2449.52,2981.08 2474.11,2981.08 2501.97,3008.94 2501.97,3050.07 v1(2801.18,3349.28) ; v1(2460.63,3040.23) 2494.1,3040.23 2501.97,3048.1
3V3_TOUCH3: C10.1 C63.2 R18.2 U30.2 UC3.4 UC3.18 | length 1215.6
  Top Layer w10: v1@3950.82,2371.18 3950.82,2270.78 4051.22,2170.38 4051.22,2138.88 ; v1(4049.21,2056.18) 4049.22,2136.88 4051.22,2138.88 ; v1(4322.83,2150.67) 4057.62,2150.68 4051.22,2144.18 4051.22,2138.88
  Bottom Layer w10: v1(3950.79,2371.14) 4147.63,2567.99 4147.63,2587.68 ; v1@3950.82,2371.18 UC3.18@3951.12,2326.61 ; UC3.4@4045.92,1982.61 4045.93,2052.9 v1(4049.21,2056.18) ; U30.2@4149.6,2636.9 4149.61,2589.65 4147.63,2587.68 ; C10.1@4232.28,2582.72 4184.08,2582.72 C63.2@4181.1,2585.71 4179.12,2587.68 4147.63,2587.68 ; v1(4322.83,2150.67) 4338.58,2134.92 R18.2@4338.57,2132.95
+5V: C1.2 C16.2 C30.2 C34.2 LED15.1 LED15.3 LED16.1 LED16.3 LED17.1 LED17.3 LED18.1 LED18.3 LED19.1 LED19.3 LED20.1 LED20.3 LED21.1 LED21.3 LED22.1 LED22.3 pad.12 R47.2 U3.3 U4.3 U28.3 U30.3 | length 13740.3
  Top Layer w20: v2(3927.17,3569.96) 4068.9,3711.69 v2(4070.87,3711.69) ; v2@4248.03,4457.75 v2(4305.12,4400.67) v2(4305.12,4229.41) ; v2(4465.59,4149.23) 4530.02,4213.66 v2(4584.64,4213.66) ; v2(5228.34,4286.49) 5281.49,4339.65 5348.42,4339.65 5395.66,4292.4 v2(5440.94,4292.4) ; v2(5342.52,2788.47) 5381.88,2827.84 v2(5385.82,2827.84) ; v2(5342.52,2788.47) 5411.42,2719.58 v2@5433.02,2719.58 ; v2(5692.06,4319.96) 5820.86,4191.15 v2(5820.87,4142.8) ; v2(6112.2,3319.96) v2(6112.2,3209.73) 6118.1,3209.73 v2(6216.53,3111.3) ; v2(6738.22,3591.61) v2(6738.22,3699.88)
  Bottom Layer w20: C30.2@2266.21,3887.78 2222.9,3887.79 U28.3@2173.69,3937 2159.42,3951.28 2159.42,4556.18 2169.32,4565.98 2956.72,4565.98 3005.92,4516.78 pad.12@3694.88,4516.81 3753.93,4457.98 4216.53,4457.75 v2@4248.02,4457.75 ; v2(3927.17,3569.96) 3852.36,3495.15 3852.36,3414.45 4202.71,3064.09 4202.71,2784.58 ; v2(4070.87,3711.69) 4175.19,3816.02 4175.19,4119.17 4285.43,4229.41 v2(4305.12,4229.41) 4322.84,4211.68 U3.3@4322.84,4174.29 C1.2@4465.58,4174.29 v2(4465.59,4149.23) ; 4175.22,4005.78 C16.2@4196.85,4005 ; U30.3@4187,2735.3 4202.72,2751.08 4202.72,2784.58 ; C34.2@4246.02,2784.58 4202.72,2784.58 ; v2(4305.12,4400.67) 4889.76,4400.67 4970.47,4319.96 5023.63,4319.96 5057.11,4286.48 5104.32,4286.48 5121.02,4303.18 R47.2@5121.02,4315.98 ; U4.3@4374.02,4081.78 U4.3@4375.98,4081.76 ; U4.3@4375.98,4081.76 4375.98,4174.29 ; v2(4584.64,4213.66) 4584.95,4213.98 LED18.1@4686.06,4213.98 ; LED21.3@4686.06,2599.18 LED21.1@4686.06,2639.18 4686.05,2655.62 4700.78,2670.36 4948.81,2670.36 5066.93,2788.47 v2(5342.52,2788.47) ; LED22.3@4686.06,3386.57 LED22.1@4686.06,3426.57 4686.05,3452.87 4698.81,3465.63 4925.19,3465.63 5131.88,3258.94 5131.88,3081.77 5393.7,2819.96 5722.43,2819.96 v2(6112.2,3209.73) ; LED18.3@4686.06,4173.98 LED18.1@4686.06,4213.98 ; 5104.33,4286.49 v2(5228.34,4286.49) ; v2(5433.07,2719.57) 5473.77,2719.57 LED20.1@5475.43,2717.91 LED20.3@5475.43,2677.91 ; v2(5440.94,4292.4) 5442.59,4290.74 LED17.1@5473.46,4290.75 ; LED15.1@5473.42,3505.28 5473.42,3525.68 5466.52,3532.58 5486.22,3552.28 5779.52,3552.28 6011.82,3319.98 6511.82,3319.98 6738.22,3546.38 v2(6738.22,3591.61) ; LED15.3@5473.46,3465.32 LED15.1@5473.46,3505.32 ; LED17.3@5473.46,4250.75 LED17.1@5473.46,4290.75 ; v2(5692.06,4319.96) 5683.07,4319.96 5486.22,4319.96 5473.46,4307.2 LED17.1@5473.46,4290.75 ; v2(5820.87,4142.8) 6027.56,3936.1 6230.31,3936.1 ; v2(6216.53,3111.3) 6216.53,3111.61 LED19.1@6260.86,3111.61 LED19.3@6260.86,3071.61 ; LED16.3@6262.83,3859.01 LED16.1@6262.83,3899.01 6262.82,3903.58 6230.31,3936.1 ; v2(6738.22,3699.88) 6501.92,3936.08 6230.32,3936.08
  other v2: 4248.03,4457.75
AUDIO2_2: AUDIO2.2 C41.2 R54.2 | length 204.7
  Bottom Layer w39.37: C41.2@6923.22,4201.85 6923.22,4211.69 AUDIO2.2@7061.01,4349.49
AUDIO2_3: AUDIO2.3 C42.2 R53.2 | length 683.9
  Top Layer w59.05: C42.2@6883.85,4404.6 6883.85,4388.85 AUDIO2.3@7061.01,4211.69 7129.92,4280.59 7198.81,4280.59 7267.71,4211.69 AUDIO2.3@7285.42,4211.69
  Bottom Layer w47.24: 7041.33,4083.74 7041.33,4192.01 AUDIO2.3@7061.01,4211.69
BOOT0: P1.2 R31.1 U20.60 | length 314.7
  Bottom Layer w10: U20.60@3755.72,3739.68 3871.16,3739.68 P1.2@3871.57,3739.25 3903.08,3707.75 3937.21,3707.75 4003.94,3774.48 R31.1@4029.51,3774.48
C36_1: C36.1 WAVESHARE2.2 | length 131
  Bottom Layer w10: C36.1@3647.63,4173.34 3654.52,4173.28 3671.22,4190.08 3671.22,4225.48 3661.42,4235.28 WAVESHARE2.2@3661.42,4286.49
C36_2: C36.2 WAVESHARE2.3 | length 85.5
  Bottom Layer w10: WAVESHARE2.3@3633.86,4286.49 3633.86,4220.51 C36.2@3647.63,4206.74
C37_1: C37.1 WAVESHARE2.4 | length 79.8
  Bottom Layer w10: C37.1@3606.3,4206.74 WAVESHARE2.4@3606.3,4286.49
C37_2: C37.2 WAVESHARE2.5 | length 140.2
  Bottom Layer w10: WAVESHARE2.5@3578.74,4286.49 3578.74,4174.29 3579.69,4173.34 C37.2@3606.3,4173.34
C47_2: C47.2 WAVESHARE2.27 | length 96.5
  Bottom Layer w10: C47.2@2972.44,4190.04 WAVESHARE2.27@2972.44,4286.49
C51_1: C51.1 WAVESHARE2.28 | length 122.1
  Bottom Layer w10: C51.1@2899.6,4190.04 2911.42,4190.04 2944.88,4223.5 WAVESHARE2.28@2944.88,4286.49
CHRG-: IC2.1 R57.2 | length 42.1
  Bottom Layer w10: R57.2@5266.76,4347.48 5273.21,4353.94 IC2.1@5273.21,4386.93
CS_FLASH: U2.1 U20.24 | length 79.2
  Bottom Layer w10: U2.1@3240.15,3800.26 3241.66,3798.74 U20.24@3318.72,3798.74
CS_OLED: U20.36 WAVESHARE2.13 | length 296.8
  Bottom Layer w10: WAVESHARE2.13@3358.27,4286.49 3358.32,4227.38 3448.65,4137.05 U20.36@3448.64,4027.09
CS_TOUCH1: U20.61 UC1.14 | length 394.2
  Bottom Layer w10: U20.61@3755.72,3720.01 3808.62,3720 3937,3591.61 4091.53,3591.61 UC1.14@4095.21,3595.31
CS_TOUCH2: U20.14 UC2.14 | length 1364.5
  Bottom Layer w10: UC2.14@2324.52,3075.18 2324.52,3107.18 2336.62,3119.18 2435.02,3119.18 2809.02,3493.18 3379.92,3493.18 3428.92,3542.18 U20.14@3428.95,3590.09
CS_TOUCH3: pad.23 U20.62 UC3.14 | length 2037.5
  Bottom Layer w10: U20.62@3755.72,3700.32 3804.72,3700.28 3858.32,3646.78 3858.32,3577.88 3852.32,3571.98 3767.72,3571.98 3714.52,3518.78 3714.52,3457.78 4127.92,3044.38 4127.92,2798.28 3990.12,2660.48 pad.23@3990.12,2540.49 3990.12,2508.88 3793.32,2312.08 3793.32,2227.48 3819.12,2201.58 UC3.14@3857.02,2201.61
DB_DRUM: pad.26 U1.12 U20.17 | length 657.3
  Bottom Layer w10: U1.12@2796.19,3793.62 2807.82,3793.58 pad.26@2861.74,3739.66 ; pad.26@2861.74,3739.66 2877.92,3723.48 2877.92,3640.78 2895.72,3623.08 3280.82,3623.08 U20.17@3318.72,3660.98
DB_INSTR: U1.14 U20.15 | length 738.9
  Bottom Layer w10: U1.14@2796.19,3693.62 2805.52,3693.58 2842.52,3656.58 2842.52,3627.08 2881.92,3587.68 3322.82,3587.68 3376.02,3640.78 3395.72,3640.78 3409.32,3627.18 U20.15@3409.27,3590.09
DB_LOOP: U1.13 U20.20 | length 786.8
  Bottom Layer w10: U1.13@2796.19,3743.62 2804.72,3743.58 2860.22,3688.08 2860.22,3634.88 2891.72,3603.38 3314.32,3603.38 3365.92,3655.08 3365.92,3710.18 3356.12,3720.08 U20.20@3318.72,3720.08
DB_VOL: U1.15 U20.16 | length 630.5
  Bottom Layer w10: U1.15@2796.19,3643.62 2800.32,3643.58 2872.02,3571.98 3371.42,3571.98 U20.16@3389.58,3590.09
DC_OLED: U20.34 WAVESHARE2.15 | length 303.4
  Bottom Layer w10: WAVESHARE2.15@3303.15,4286.49 3303.11,4227.48 3409.28,4121.32 U20.34@3409.27,4027.09
GND: BAT2.2 C1.1 C2.2 C3.1 C7.2 C10.2 C11.1 C12.1 C16.1 C17.1 C29.1 C30.1 C31.1 C32.2 C33.2 C34.1 C35.1 C38.2 C39.1 C40.1 C43.1 C46.1 C47.1 C48.2 C49.2 C50.1 C51.2 C52.1 C53.1 C54.1 C55.1 C56.1 C57.1 C60.2 C61.1 C62.2 C63.1 C64.1 C67.1 C68.2 C69.1 C79.1 C80.2 C81.1 C83.1 C84.1 C86.1 IC2.2 LED3.2 LED3.4 P3.2 pad.4 R2.1 R4.1 R5.2 R7.1 R12.2 R13.1 R31.2 R35.1 R52.2 R56.2 SR3.8 SR4.8 SW2.4 SW2.5 TV1.2 U1.1 U2.4 U3.1 U4.1 U8.9 U8.10 U8.13 U8.14 U8.15 U8.18 U8.25 U8.36 U8.37 U8.45 U8.48 U8.PAD U15.1 U15.4 U15.6 U15.8 U15.9 U20.12 U20.18 U20.28 U20.63 U28.1 U30.1 UC1.5 UC1.21 UC2.5 UC2.21 UC3.5 UC3.21 USBC1.0 USBC1.A1 USBC1.A12 USBC1.B1 USBC1.B12 WAVESHARE2.1 WAVESHARE2.8 WAVESHARE2.11 WAVESHARE2.12 WAVESHARE2.16 WAVESHARE2.17 WAVESHARE2.21 WAVESHARE2.22 WAVESHARE2.23 WAVESHARE2.24 WAVESHARE2.25 WAVESHARE2.29 WAVESHARE2.30 X1.2 X1.4 X3.2 X3.4 | length 26071.7
  Top Layer w5: v1(2342.52,2886.89) 2342.52,2725.47 v1(2464.57,2603.43)
  Top Layer w10: v1(2066.93,2916.42) 2244.31,2916.42 v1(2265.75,2937.86) ; v1(2120.08,4499.09) 2120.07,4550.27 2668.66,4550.27 2757.88,4461.06 v1(2757.88,4371.14) 2866.84,4371.14 2907.47,4330.51 v1(2907.48,4359.33) 3411.47,4359.33 v1(3413.42,4357.38) ; v1(2632.87,3593.62) 2906.45,3867.2 v1(2986.22,3867.2) 2986.22,4114.38 v1(3006.72,4134.88) 3086.61,4214.77 v1(3086.62,4215.63) 3149.6,4152.64 v1(3295.28,4152.64) 3368.11,4079.8 v1(3368.11,3875.08) 3279.53,3786.5 v1(3279.52,3678.02) 3316.72,3640.83 v1(3466.54,3640.83) 3535.43,3709.72 v1(3675.2,3709.72) 3793.3,3827.83 3911.41,3827.83 3933.53,3849.96 P3.2@3933.54,3869.17 ; 3334.16,3640.83 3334.16,3536.97 v1(3397.64,3473.5) 3423.23,3447.91 v1(3553.15,3447.91) 3594.48,3406.57 3596.45,3406.57 ; v1(3683.07,3406.58) 3596.45,3406.57 ; v1@3687.95,4170.98 v1(3757.95,4170.98) 3787.95,4170.98 3885.82,4073.11 v1(3885.83,4060.98) ; 3744.57,3772.72 4045.27,3772.72 v1(4196.85,3621.14) ; v1(3885.83,4060.98) 3985.35,4060.98 v1(4076.77,3969.57) ; P3.2@3933.54,3869.17 4032.72,3968.38 4076.82,3968.38 v1(4076.77,3969.57) ; v1(4127.95,3804.21) 4064.95,3867.2 v1(4049.21,3867.2) 4076.77,3894.76 v1(4076.77,3969.57) ; USBC1.0@4199.62,4357.18 4177.92,4357.18 4177.92,4510.98 4242.02,4510.98 4407.52,4345.58 ; 4629.93,4345.55 SW2.4@4629.92,4499.09 ; 4952.74,4345.55 SW2.5@4952.74,4499.09 ; 4958.62,4345.58 5132.52,4345.58 5207.92,4420.98 v1(5237.95,4420.98) ; 4958.66,4345.55 4407.48,4345.55 4407.48,4230.52 v1(4387.95,4210.98) 4358.27,4181.3 v1(4358.27,4038.47) 4145.67,4038.47 v1(4076.77,3969.57) ; v1(5237.95,4420.98) 5237.95,4538.23 v1(5242.12,4542.4) 5242.12,4554.18 5818.92,4554.18 5858.22,4514.88 5905.52,4514.88 v1(5905.51,4533.58) 5905.5,4440.03 v1(5891.74,4426.26) 5970.47,4426.26 v1(6017.72,4379.02) ; v1(5938.97,4239.25) 6017.71,4318 v1(6017.72,4379.02) ; v1(6927.16,3471.54) v1(6927.16,3924.1) 6865.94,3985.32 v1(6805.12,3985.32) 6617.15,3985.32 v1(6588.58,4013.89) 6442.9,4159.56 v1(6442.91,4231.38) 6373.3,4300.98 v1(6367.95,4300.98) 6367.95,4304.37 v1(6307.08,4365.23) 6293.3,4379.02 v1(6017.72,4379.02) ; 3596.45,3406.57 v1(3519.69,3329.8) 3596.45,3406.58
  Top Layer w19.68: v1(2265.75,2937.86) 2267.52,2937.88 2613.92,3284.28 2783.42,3284.28 2832.72,3333.58 2832.72,3374.98 2632.82,3574.88 v1@2632.82,3593.58 ; v1@3683.02,3406.58 3694.92,3394.78 3832.72,3394.78 3931.12,3296.38 4206.72,3020.78 v1(4206.72,2686.08) 3911.42,2390.78 3911.42,2268.78 v1@3964.52,2215.68
  Top Layer w20: USBC1.0@3859.42,4357.18 3859.42,4395.98 3881.92,4418.38 4177.12,4418.38 4199.62,4395.98 USBC1.0@4199.62,4357.18 ; USBC1.0@3859.45,4521.7 3859.45,4479.64 3920.7,4418.39 ; 4138.35,4418.39 4199.61,4479.64 USBC1.0@4199.6,4521.7
  Bottom Layer w7.87: USBC1.A1@3897.63,4315.11 USBC1.B12@3908.13,4315.1
  Bottom Layer w10: v1(2066.93,2916.42) 2068.15,2917.64 UC2.5@2105.55,2917.64 ; BAT2.2@2120.07,4452.82 v1(2120.08,4499.09) ; LED3.4@2473.39,2540.12 LED3.2@2473.39,2580.12 ; v1(2757.88,4371.14) 2761.25,4374.52 R35.1@2761.25,4400.98 ; WAVESHARE2.30@2889.76,4286.49 2889.76,4341.61 v1(2907.48,4359.33) 2917.31,4357.38 ; C61.1@2959.61,3867.2 v1(2986.22,3867.2) ; 3028.88,4357.38 3028.88,4287.81 WAVESHARE2.25@3027.56,4286.49 3027.56,4219.56 3055.12,4219.56 ; 3054.42,4357.38 WAVESHARE2.24@3055.12,4286.49 3055.12,4219.56 ; 3083.69,4357.38 3082.68,4356.36 WAVESHARE2.23@3082.68,4286.49 3082.68,4221.44 v1@3084.55,4219.57 ; WAVESHARE2.22@3110.24,4286.49 3110.32,4357.38 ; WAVESHARE2.22@3110.24,4286.49 3110.24,4221.53 3112.2,4219.56 ; 3138.12,4357.38 WAVESHARE2.21@3137.8,4286.49 3137.79,4219.56 3112.2,4219.56 ; U2.4@3240.15,3650.26 3251.77,3650.26 v1(3279.52,3678.02) 3282.19,3680.68 U20.18@3318.72,3680.68 ; 3247.42,4357.38 WAVESHARE2.17@3248.03,4286.49 3248.02,4221.58 3275.62,4221.58 WAVESHARE2.16@3275.59,4286.49 3275.22,4357.38 ; 3261.02,4221.58 3259.84,4220.4 C2.2@3259.84,4160.51 3278.5,4160.52 C35.1@3316.93,4122.09 ; v1(3295.28,4152.64) 3316.93,4130.98 C35.1@3316.93,4122.09 ; U20.28@3318.72,3877.49 3365.71,3877.48 v1(3368.11,3875.08) ; R12.2@3358.26,4122.09 C35.1@3316.93,4122.09 ; 3385.52,4357.38 WAVESHARE2.12@3385.83,4286.49 ; WAVESHARE2.12@3385.83,4286.49 3385.82,4221.53 3413.38,4221.53 ; v1(3397.64,3473.5) 3399.61,3473.5 C64.1@3415.36,3489.25 ; WAVESHARE2.11@3413.38,4286.49 3413.38,4221.53 ; v1(3466.54,3640.83) 3468.33,3639.03 U20.12@3468.32,3590.09 ; C39.1@3468.5,4173.34 3461.58,4173.33 3413.38,4221.53 ; C39.1@3468.52,4173.38 3489.22,4173.38 3496.02,4180.18 ; C81.1@3488.18,3345.55 3549.18,3345.55 X3.4@3559.05,3335.71 ; WAVESHARE2.8@3496.02,4286.48 3496.02,4180.18 ; v1(3519.69,3329.8) 3519.68,3345.55 ; C38.2@3525.59,4173.34 3502.86,4173.34 3496.01,4180.18 ; v1(3553.15,3447.91) 3557.09,3451.85 C43.1@3557.08,3470.58 ; X3.2@3645.66,3398.71 3657.45,3386.9 C80.2@3716.53,3386.89 ; v1(3675.2,3709.72) 3704.29,3680.63 U20.63@3755.72,3680.64 3802.71,3680.63 3832.67,3650.67 C46.1@3832.67,3628 ; v1(3683.07,3406.58) 3683.07,3389.09 3685.25,3386.9 ; v1(3687.95,4170.98) TV1.2@3722.44,4170.35 ; v1(3687.95,4170.98) 3688.97,4172 WAVESHARE2.1@3688.97,4286.49 ; TV1.2@3722.44,4170.35 3723.06,4170.98 v1(3757.95,4170.98) ; C40.1@3885.82,4033.51 v1(3885.83,4060.98) ; UC3.5@4014.52,1982.61 4014.52,2139.61 pad.4@4029.52,2154.61 4029.52,2217.48 4045.52,2233.48 UC3.21@4045.52,2326.61 ; C67.1@4040.58,3947.25 4057.27,3947.25 v1@4079.94,3969.93 ; v1(4049.21,3867.2) 4051.54,3869.54 U15.1@4077.97,3869.53 ; R31.2@4068.89,3774.48 4098.21,3774.48 v1(4127.95,3804.21) 4143.88,3820.14 C69.1@4143.87,3832.13 ; U15.4@4077.97,3928.59 4077.99,3967.99 4079.99,3969.9 4101.09,3969.9 4117.28,3953.69 4117.28,3920.69 4129.19,3908.89 U15.8@4137.02,3908.91 U15.9@4137.4,3888.82 ; U15.8@4137.02,3908.91 4136.99,3899.09 4154.69,3881.29 4154.69,3842.99 C69.1@4143.87,3832.13 ; UC1.5@4252.71,3376.31 4252.72,3539.22 pad.4@4265.74,3552.24 4283.72,3570.22 UC1.21@4283.71,3720.31 ; v1(4387.95,4210.98) U3.1@4421.24,4211.69 ; U3.1@4421.24,4211.69 4458.67,4211.69 C50.1@4470.47,4223.51 4470.52,4217.58 4499.02,4189.08 C1.1@4498.98,4174.29 ; C33.2@5217.48,4546.34 5219.45,4544.37 v1(5242.12,4542.4) 5244.09,4544.37 R52.2@5264.79,4544.37 ; C32.2@5219.45,4347.48 5236.21,4364.24 IC2.2@5236.21,4386.93 5236.21,4419.25 v1(5237.95,4420.98) ; C32.2@5219.45,4347.48 5225.41,4347.48 R56.2@5266.76,4306.14 ; v1(5905.51,4533.58) C57.1@5929.13,4533.57 C56.1@5969.51,4534.52 ; R13.1@5931.09,4279.64 5959.61,4279.64 5969.52,4269.73 C54.1@5969.51,4190.04 C55.1@5969.51,4231.38 ; R13.1@5931.12,4279.68 5938.92,4279.68 v1@5938.92,4239.28 ; v1(5938.97,4239.25) 5961.65,4239.25 C55.1@5969.51,4231.38 ; C49.2@5969.51,4314.05 C48.2@5969.51,4272.72 C55.1@5969.51,4231.38 ; X1.2@5982.29,4382.95 5986.23,4379.02 v1(6017.72,4379.02) ; U8.25@6254.04,4213.28 6285.04,4213.28 v1(6307.08,4235.31) U8.PAD@6372.04,4300.27 ; U8.36@6254.04,4387.28 6285.04,4387.28 v1(6307.08,4365.23) ; U8.37@6285.01,4436.08 6285.01,4387.3 v1(6307.08,4365.23) ; U8.PAD@6372.04,4300.27 v1(6307.08,4365.23) ; U8.18@6380.04,4182.28 6380.04,4292.28 U8.PAD@6372.04,4300.27 ; U8.45@6411.04,4455.78 6411.04,4339.28 U8.PAD@6372.04,4300.27 ; U8.15@6427.04,4182.28 U8.PAD@6427.04,4245.28 ; v1(6442.91,4231.38) 6442.91,4182.41 U8.14@6443.04,4182.28 ; U8.13@6459.04,4182.28 6459.04,4201.85 6372.04,4288.85 U8.PAD@6372.04,4300.27 ; U8.48@6459.04,4455.78 6459.04,4389.24 v1(6438.97,4369.17) 6438.97,4367.2 U8.PAD@6372.04,4300.27 ; U8.10@6529.52,4245.27 U8.PAD@6427.04,4245.28 ; U8.9@6529.52,4261.27 6411.04,4261.28 U8.PAD@6372.04,4300.27 ; v1(6588.58,4013.89) C53.1@6614.16,4013.89 C52.1@6655.5,4013.89 6664.38,4005.01 R2.1@6805.11,4004.99 v1(6805.12,3985.32) ; C62.2@6821.81,3473.5 6823.98,3471.34 SR4.8@6884.96,3471.34 6885.16,3471.54 v1(6927.16,3471.54) ; C60.2@6823.78,3924.29 SR3.8@6884.92,3924.08 ; SR3.8@6884.96,3924.09 v1(6927.16,3924.1) ; 3055.12,4219.56 v1@3084.55,4219.57 ; v1@3084.55,4219.57 3112.21,4219.57 ; v1(6307.08,4365.23) U8.PAD@6372.04,4300.27 ; U8.PAD@6372.04,4300.27 U8.PAD@6427.04,4245.28 ; U8.PAD@6372.04,4300.27 U8.PAD@6427.04,4245.28 ; C12.1@5852.36,4422.32 5887.79,4422.32 v1(5891.74,4426.26) 5919.29,4453.81 X1.4@5919.29,4469.57 5856.3,4469.58 C11.1@5852.36,4465.63 C12.1@5852.36,4422.32
  Bottom Layer w15.75: UC2.5@2105.55,2917.64 2245.52,2917.64 v1(2265.75,2937.86) ; pad.4@2277.55,2902.64 2277.55,2926.05 v1(2265.75,2937.86) ; UC2.21@2449.55,2886.64 2316.97,2886.64 v1(2265.75,2937.86) ; v1(2464.57,2603.43) 2473.39,2594.61 LED3.2@2473.39,2580.12
  Bottom Layer w19.68: BAT2.2@2120.07,4452.82 2120.12,3929.58 U28.1@2211.09,3838.6 ; C30.1@2266.21,3848.41 2220.91,3848.42 U28.1@2211.09,3838.6 ; C86.1@2622.04,3458.3 2605.12,3458.28 2582.72,3479.18 2582.72,3567.78 2570.02,3580.48 U1.1@2570.01,3593.62 v1(2632.87,3593.62) ; C86.1@2622.04,3458.3 C84.1@2667.32,3458.3 2669.01,3456.59 C83.1@2712.59,3456.59 ; WAVESHARE2.30@2889.72,4286.48 2856.32,4253.08 2856.32,4158.58 2879.92,4134.88 C51.2@2899.6,4134.92 C47.1@2972.44,4134.92 R4.1@3032.17,4134.92 ; WAVESHARE2.29@2917.32,4286.49 2917.32,4363.28 3413.42,4363.28 WAVESHARE2.11@3413.38,4286.49 ; C79.1@3828.74,4044.37 3839.6,4033.51 C40.1@3885.82,4033.51 ; C40.1@3885.82,4033.51 3912.43,4060.12 R7.1@3933.74,4060.12 ; C63.1@4181.1,2546.34 4184.09,2549.33 C10.2@4232.28,2549.32 4247.08,2549.33 4265.74,2567.99 4265.74,2607.36 4236.21,2636.9 U30.1@4224.4,2636.9 4224.41,2668.39 v1(4206.72,2686.08) 4246.06,2725.42 C34.1@4246.06,2745.16 ; C16.1@4236.22,4005 4269.68,4038.47 C17.1@4285.43,4038.47 v1(4358.27,4038.47) U4.1@4413.38,3983.36 4416.37,3986.34 C3.1@4416.37,4097.52 ; C7.2@4304.1,3934.13 4304.12,3937.08 4357.22,3937.08 4403.52,3983.38 U4.1@4413.38,3983.36 ; U28.1@2211.09,3838.6 2177.61,3838.6 2173.69,3842.52 2173.69,3793.29 2169.79,3789.39 C29.1@2152.04,3789.38 2211.09,3789.39 C31.1@2211.09,3786.39 U28.1@2211.09,3838.6
  Bottom Layer w20: R5.2@3775.59,4344.87 3787.84,4357.13 USBC1.0@3859.45,4357.13 3859.45,4353.29 USBC1.A1@3897.63,4315.11 ; USBC1.A12@4161.41,4315.11 4199.61,4353.29 USBC1.0@4199.6,4357.13
  other v1: 3964.57,2215.63
GNDA: AUDIO2.1 C44.2 C45.2 C58.2 C59.2 R2.2 R53.1 R54.1 U8.4 | length 2093.5
  Top Layer w10: v1(6763.77,4310.12) 6765.74,4308.15 v1(6765.74,4266.81) ; v1(6765.74,4225.47) v1(6765.75,4182.17) 6805.11,4142.8 v1@6805.11,4064.05 ; 6805.11,4123.11 v1(6995.11,4123.11) 7277.56,4123.11 7356.29,4201.85 7356.29,4404.6 AUDIO2.1@7285.42,4475.47 7263.77,4497.13 7082.68,4497.13 AUDIO2.1@7061.01,4475.47 6996.05,4410.51 v1(6996.06,4343.58)
  Bottom Layer w10: U8.4@6529.52,4339.68 6743.11,4339.68 C44.2@6743.08,4310.12 C45.2@6743.07,4266.81 ; v1(6765.75,4182.17) 6763.78,4184.13 C58.2@6743.07,4184.13 C59.2@6743.07,4225.47 ; R2.2@6805.11,4044.36 v1@6805.11,4064.05 ; C59.2@6743.07,4225.47 v1(6765.74,4225.47) v1(6765.74,4266.81) C45.2@6743.07,4266.81 ; C59.2@6743.07,4225.47 C45.2@6743.07,4266.81
  Bottom Layer w19.68: C44.2@6743.08,4310.12 v1(6763.77,4310.12) ; R54.1@6973.07,4320.56 v1@6996.05,4343.54 ; R53.1@6995.1,4091.61 v1(6995.11,4123.11)
  other v1: 6805.11,4064.05
IC2_6: IC2.6 R52.1 | length 53.8
  Bottom Layer w10: IC2.6@5273.21,4500.93 5298.19,4525.91 R52.1@5298.19,4544.37
KDRUM1_1: KDRUM1.1 RN1.4 | length 632.6
  Bottom Layer w5: RN1.4@2384.74,3800.07 2474.42,3710.38 2474.42,3315.98 KDRUM1.1@2395.62,3237.28
KINSTR_1: KINSTR.1 RN1.2 | length 233.2
  Bottom Layer w5: RN1.2@2384.74,3839.44 2366.22,3839.44 2366.22,4024.69 KINSTR.1@2395.66,4024.68
KLOOP_1: KLOOP.1 RN1.3 | length 236.7
  Bottom Layer w5: RN1.3@2384.75,3819.75 2366.22,3819.75 2366.22,3630.98 KLOOP.1@2395.62,3630.98
KMINOR_1: KMINOR.1 R36.1 | length 1475.3
  Top Layer w5: v1(2986.22,2587.68) 3084.64,2489.25 KMINOR.1@3379.92,2489.25
  Bottom Layer w5: R36.1@2027.95,2561.29 2179.42,2561.28 2256.22,2638.08 2403.02,2638.08 2439.02,2674.08 2643.92,2674.08 2730.32,2587.68 v1(2986.22,2587.68)
KSHIFT_1: KSHIFT.1 R34.1 | length 749
  Top Layer w5: v1(2277.56,2430.2) 2397.63,2310.12 KSHIFT.1@2419.32,2310.08
  Bottom Layer w5: R34.1@1977.95,2741.29 1977.92,2520.98 2068.72,2430.18 v1@2277.52,2430.18
KVOL1_1: KVOL1.1 RN1.1 | length 663.2
  Bottom Layer w5: RN1.1@2384.74,3859.12 2387.24,3859.12 2513.82,3985.7 2513.82,4083.78 2395.62,4201.88 KVOL1.1@2395.62,4418.38
LED12_2: LED12.2 R56.1 | length 144.4
  Bottom Layer w10: R56.1@5300.16,4306.14 5380.23,4386.22 LED12.2@5380.23,4417.4
LED12_4: LED12.4 R57.1 | length 86.5
  Bottom Layer w10: R57.1@5300.16,4347.48 5300.15,4377.32 LED12.4@5340.23,4417.4
NC: U8.17 U8.19 U8.21 U8.22 U8.23 U8.43 U8.44
R1_2: LED3.1 R1.2 | length 1402.6
  Top Layer w5: v1(2324.81,2579.81) 2324.82,2929.98 2407.52,3012.68 2472.42,3012.68 2494.12,3034.28 v1(2494.09,3073.69)
  Bottom Layer w10: v1(2324.81,2579.81) 2353.07,2579.8 LED3.1@2353.39,2580.12 ; v1(2494.09,3073.69) 2494.09,3075.65 2872.21,3453.78 R1.2@3107.31,3453.82
R3_1: R3.1 R4.2 | length 49.2
  Bottom Layer w10: R4.2@3066.25,4134.92 R3.1@3066.25,4184.13
R17_1: KSHARP.1 R17.1 | length 4061.2
  Top Layer w5: v1(6824.8,2312.09) 7015.74,2503.02 KSHARP.1@7015.74,2605.39
  Bottom Layer w5: R17.1@4287.09,3185.11 4287.09,3117.51 4360.21,3044.38 4360.21,2591.68 4477.91,2473.98 4477.91,2119.68 4620.12,1977.48 6253.91,1977.48 6588.62,2312.08 v1(6824.8,2312.09)
R19_1: KDO1.1 R19.1 | length 241.1
  Top Layer w5: v1(4561.02,3886.89) 4706.63,3886.89 KDO1.1@4746.02,3926.28
  Bottom Layer w5: R19.1@4529.52,3866.99 4549.42,3886.89 v1(4561.02,3886.89)
R20_1: KRE1.1 R20.1 | length 1186.5
  Top Layer w5: v1(5427.17,3847.52) 5531.52,3951.87 KRE1.1@5531.52,4004.98
  Bottom Layer w5: R20.1@4545.27,3811.88 4545.27,3804.22 4600.39,3749.09 4639.76,3709.72 5053.14,3709.72 5131.88,3788.47 5190.94,3847.52 v1(5427.17,3847.52)
R21_1: KMI.1 R21.1 | length 1578.5
  Top Layer w5: v1(6125.98,3642.8) 6281.49,3642.8 KMI.1@6312.99,3611.3
  Bottom Layer w5: R21.1@4767.99,3652.72 R21.1@4759.84,3644.55 6124.22,3644.56 v1(6125.98,3642.8)
R22_1: KSOL1.1 R22.1 | length 922.4
  Top Layer w5: v1(5368.11,3335.71) 5421.29,3335.71 KSOL1.1@5531.52,3225.48
  Bottom Layer w5: R22.1@4759.84,3589.44 5114.37,3589.44 v1(5368.11,3335.71)
R34_2: C27.2 R34.2 UC2.3 | length 223.9
  Bottom Layer w5: R34.2@1977.95,2780.66 1956.72,2801.98 1956.72,2839.78 1972.92,2855.98 C27.2@1977.95,2855.98 ; C27.2@1977.95,2855.98 1979.19,2854.74 UC2.3@2105.55,2854.74
R36_2: C28.2 R36.2 UC2.1 | length 257.9
  Bottom Layer w5: R36.2@2027.95,2600.66 2031.09,2597.52 C28.2@2079.49,2597.52 2079.49,2765.66 UC2.1@2105.55,2791.74
R37_1: R37.1 UC2.29 | length 902.6
  Top Layer w5: v1(2266.22,2788.1) 2266.22,2889.08 2401.62,3024.48 2468.51,3024.48 2476.41,3032.38 2476.41,3079.58 2653.6,3256.76 v1(2740.15,3256.76)
  Bottom Layer w5: UC2.29@2262.05,2730.14 2262.07,2783.95 v1(2266.22,2788.1)
  Bottom Layer w10: v1(2740.15,3256.76) 2769.96,3256.76 R37.1@2811.16,3297.95
R47_1: R47.1 SW2.1 | length 314.2
  Bottom Layer w19.68: SW2.1@4870.02,4499.08 4870.02,4463.68 4988.12,4345.58 5033.42,4345.58 5063.02,4315.98 R47.1@5087.62,4315.98
R48_1: C3.2 R48.1 U3.2 | length 227
  Bottom Layer w10: U3.2@4421.24,4136.89 4449.77,4136.89 C3.2@4449.77,4097.52 4466.53,4097.52 4551.18,4182.17 R48.1@4551.18,4204.83
R64_1: LED15.4 R64.1 | length 1373
  Bottom Layer w10: LED15.4@5593.42,3465.28 5807.42,3465.28 5990.12,3282.58 6531.52,3282.58 6773.62,3524.68 R64.1@6790.38,3524.68
R65_1: LED15.2 R65.1 | length 1400.9
  Bottom Layer w10: LED15.2@5593.42,3505.28 5793.02,3505.28 6000.02,3298.28 6521.62,3298.28 6790.42,3567.08 R65.1@6790.38,3573.9
R66_1: LED16.4 R66.1 | length 504.5
  Bottom Layer w10: LED16.4@6382.83,3859.01 6525.92,3858.98 6759.82,3625.08 R66.1@6790.38,3625.08
R69_1: LED16.2 R69.1 | length 501.5
  Bottom Layer w10: LED16.2@6382.83,3899.01 6509.52,3898.98 6736.22,3672.28 R69.1@6790.38,3672.32
R72_1: LED17.4 R72.1 | length 1415.5
  Bottom Layer w10: LED17.4@5593.42,4250.78 5746.42,4250.78 6039.32,3957.78 6513.82,3957.78 6748.02,3723.48 R72.1@6790.38,3723.5
R73_1: LED17.2 R73.1 | length 1411.6
  Bottom Layer w10: LED17.2@5593.42,4290.78 5728.02,4290.78 6045.32,3973.48 6521.62,3973.48 6722.42,3772.68 R73.1@6790.38,3772.72
R76_1: LED18.4 R76.1 | length 2268.2
  Bottom Layer w10: LED18.4@4806.02,4173.98 5291.02,4173.98 5458.62,4341.58 5698.82,4341.58 6051.22,3989.28 6527.52,3989.28 6692.92,3823.88 R76.1@6790.38,3823.9
R78_1: LED18.2 R78.1 | length 2252.9
  Bottom Layer w10: LED18.2@4806.02,4213.98 4816.22,4203.78 5299.22,4203.78 5452.72,4357.38 5704.72,4357.38 6057.12,4004.98 6533.42,4004.98 6665.32,3873.08 R78.1@6790.38,3873.11
R79_1: LED19.4 R79.1 | length 407.6
  Bottom Layer w10: LED19.4@6380.82,3071.58 R79.1@6788.42,3071.98
R80_1: LED19.2 R80.1 | length 411.5
  Bottom Layer w10: LED19.2@6380.86,3111.61 6390.4,3121.15 R80.1@6788.41,3121.14
R81_1: LED20.4 R81.1 | length 1397.8
  Bottom Layer w10: LED20.4@5595.43,2677.91 5724.12,2677.88 6185.02,3138.88 6594.52,3138.88 6627.92,3172.28 R81.1@6788.41,3172.32